# EAGLE board BLE_Mate2-Panel-v10 (EAGLE 6.6.0), part 1 of 2
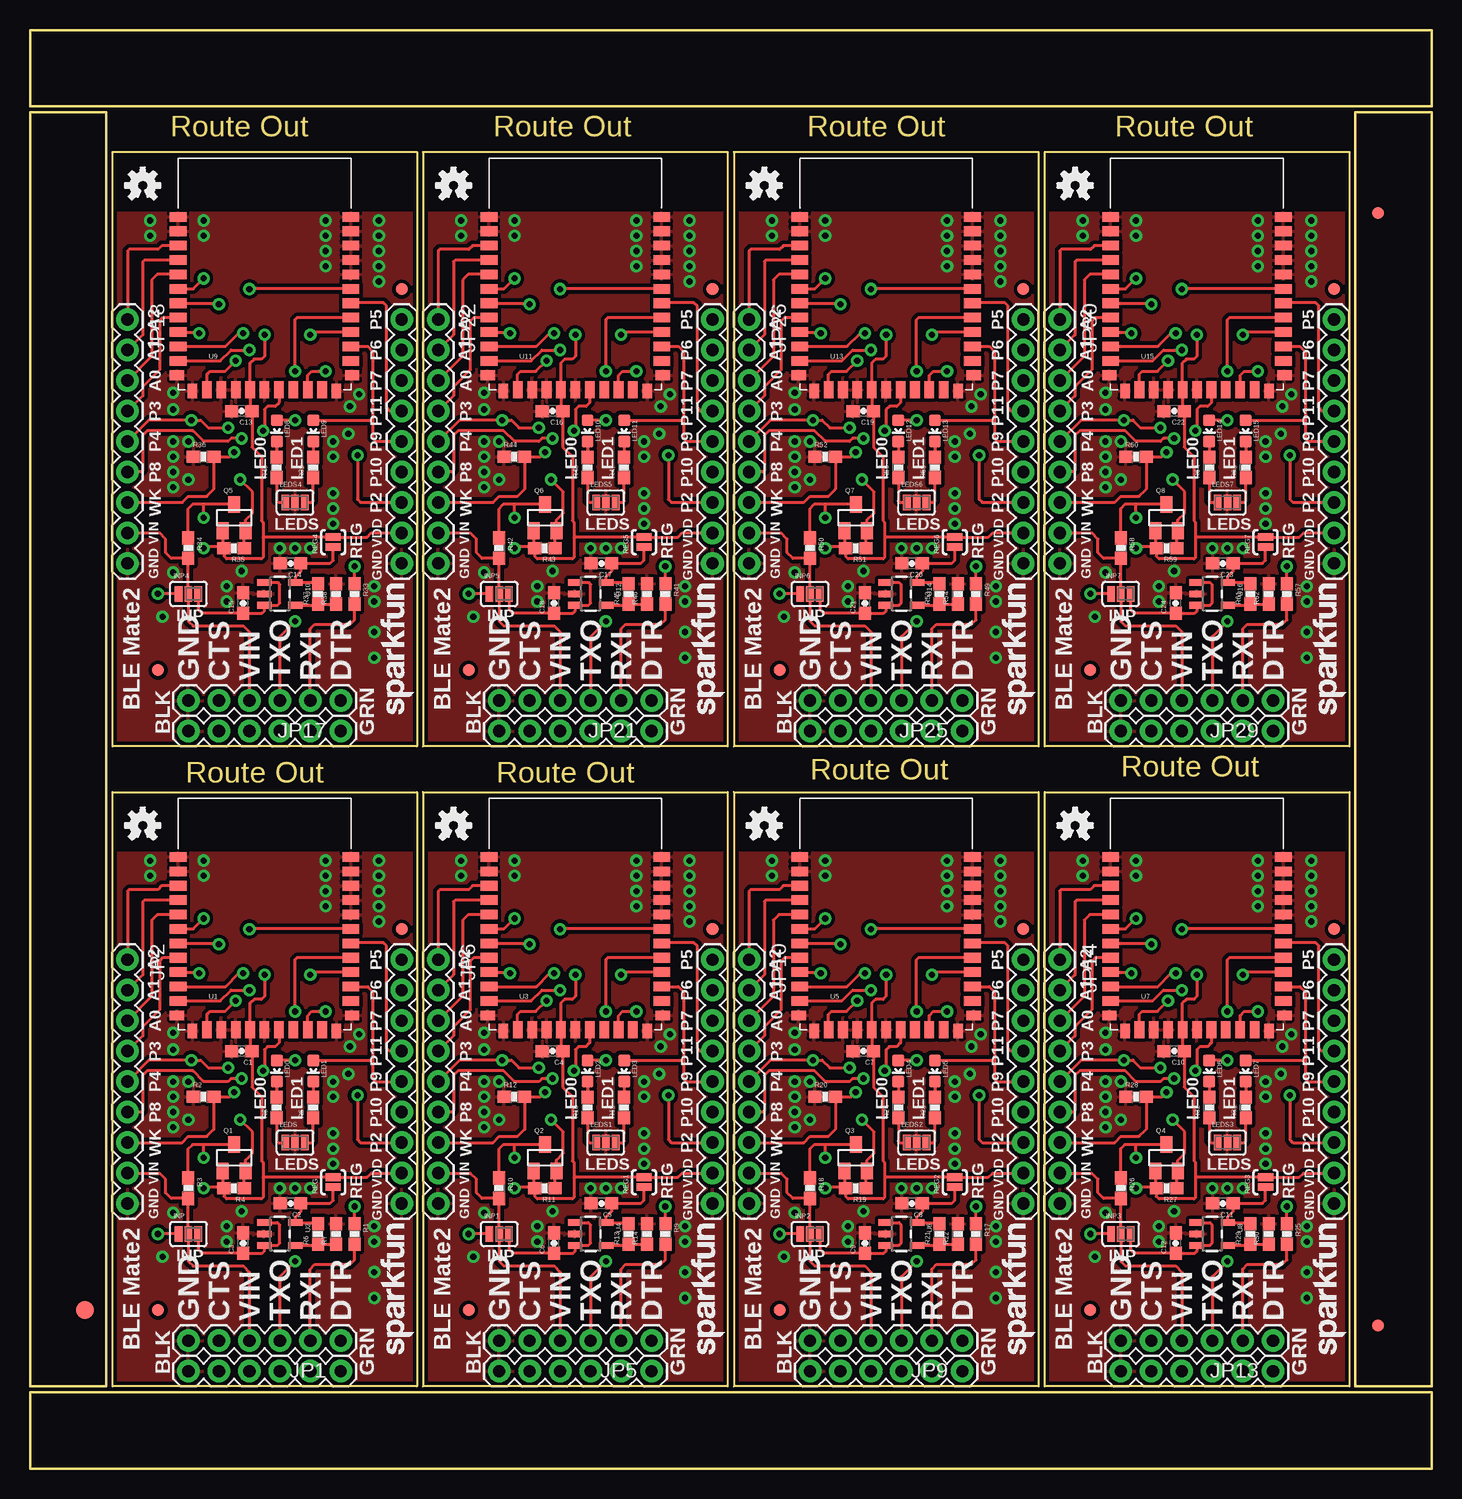
[diagram p0: board, top side]
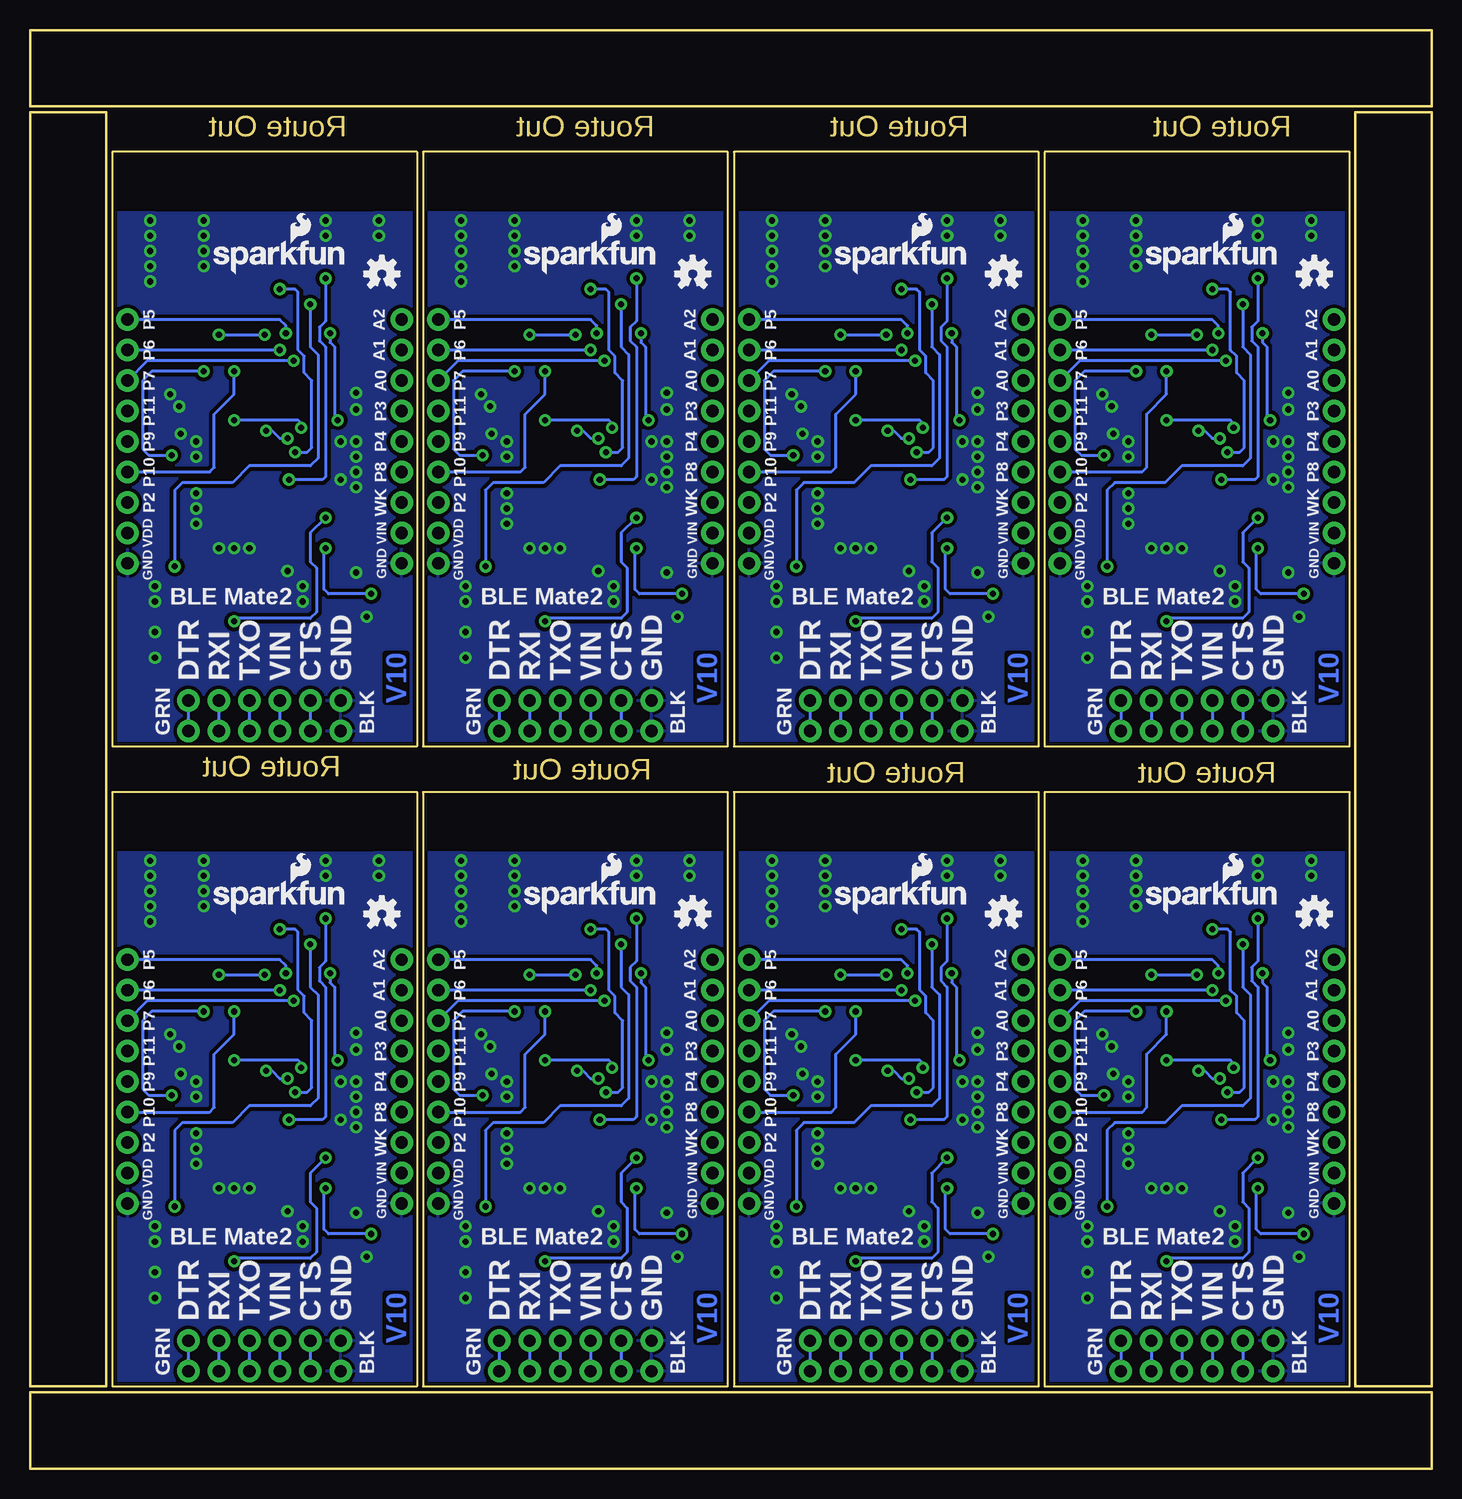
[diagram p1: board, bottom side, seen from below]

Size 116.84 x 119.89 mm. Coordinates in mm from the lower left corner, seen from the top.
Outline: 6.86,56.39 32.26,56.39 32.26,6.86 6.86,6.86 6.86,56.39
Outline: 32.77,56.39 58.17,56.39 58.17,6.86 32.77,6.86 32.77,56.39
Outline: 58.67,56.39 84.07,56.39 84.07,6.86 58.67,6.86 58.67,56.39
Outline: 84.58,56.39 109.98,56.39 109.98,6.86 84.58,6.86 84.58,56.39
Outline: 6.86,109.73 32.26,109.73 32.26,60.2 6.86,60.2 6.86,109.73
Outline: 32.77,109.73 58.17,109.73 58.17,60.2 32.77,60.2 32.77,109.73
Outline: 58.67,109.73 84.07,109.73 84.07,60.2 58.67,60.2 58.67,109.73
Outline: 84.58,109.73 109.98,109.73 109.98,60.2 84.58,60.2 84.58,109.73
Outline: 6.35,6.86 6.35,113.03 0,113.03 0,6.86 6.35,6.86
Outline: 0,0 116.84,0 116.84,6.35 0,6.35 0,0
Outline: 116.84,6.86 116.84,113.03 110.49,113.03 110.49,6.86 116.84,6.86
Outline: 116.84,119.89 0,119.89 0,113.54 116.84,113.54 116.84,119.89
Copper layers (1*16): Top 0.035mm / dielectric 1.5mm / Bottom 0.035mm
Design rules "Sparkfun *": minimum track width 8mil, minimum drill 20mil, track to track 8mil, track to pad 8mil, pad to pad 8mil, via to via 8mil, smd to smd 8mil, copper to edge 8mil, drill to drill 8mil, minimum pad ring 12mil, minimum via ring 10mil, stop-mask expansion 4mil, vias tented up to drill 20mil, thermal gap 10mil

## Footprints (pad centres in the part's own frame; a part is rotated, then mirrored left to right if it is on the bottom)
0603-CAP = smd 1.1 x 1: 1 -0.85,0; 2 0.85,0
FIDUCIAL-1.5X3 = smd 1.5 x 1.5: 1 0,0
FIDUCIAL-1X2 = smd 1 x 1: 1 0,0
PAD-JUMPER-3-2OF3_NC_BY_PASTE_YES_SILK_FULL_BOX = smd 0.635 x 1.27: 1 -0.813,0; 2 0,0; 3 0.813,0
FTDI_BASIC = drill 1.016 pad 1.88: CTS 10.16,0; DTR 0,0; GND 12.7,0; RXI 2.54,0; TXO 5.08,0; VCC 7.62,0
1X09 = drill 1.016 pad 1.88: 1 0,0; 2 2.54,0; 3 5.08,0; 4 7.62,0; 5 10.16,0; 6 12.7,0; 7 15.24,0; 8 17.78,0; 9 20.32,0
1X06 = drill 1.016 pad 1.88: CTS 10.16,0; DTR 0,0; GND 12.7,0; RXI 2.54,0; TXO 5.08,0; VCC 7.62,0
LED-0603 = smd 1 x 1: A 0,-0.877; C 0,0.877
PAD-JUMPER-3-NC_BY_PASTE_YES_SILK_FULL_BOX = smd 0.635 x 1.27: 1 -0.813,0; 2 0,0; 3 0.813,0
SOT23 = smd 1 x 1.4: 1 -0.95,-1.1; 2 0.95,-1.1; 3 0,1.1
0603-RES = smd 1.1 x 1: 1 -0.85,0; 2 0.85,0
PAD-JUMPER-2-NC_BY_PASTE_YES_SILK = smd 0.635 x 1.27: 1 -0.401,0; 2 0.413,0
BC118 = smd 1.4 x 0.8: 1 -7.2,4.75; 2 -7.2,3.55; 3 -7.2,2.35; 4 -7.2,1.15; 5 -7.2,-0.05; 6 -7.2,-1.25; 7 -7.2,-2.45; 8 -7.2,-3.65; 9 -7.2,-4.85; 10 -7.2,-6.05; 11 -7.2,-7.25; 25 7.2,-7.25; 26 7.2,-6.05; 27 7.2,-4.85; 28 7.2,-3.65; 29 7.2,-2.45; 30 7.2,-1.25; 31 7.2,-0.05; 32 7.2,1.15; 33 7.2,2.35; 34 7.2,3.55; 35 7.2,4.75 | smd 1.2 x 0.8: 12 -7.3,-8.45; 24 7.3,-8.45 | smd 0.8 x 1.2: 13 -6,-9.75; 23 6,-9.75 | smd 0.8 x 1.4: 14 -4.8,-9.65; 15 -3.6,-9.65; 16 -2.4,-9.65; 17 -1.2,-9.65; 18 0,-9.65; 19 1.2,-9.65; 20 2.4,-9.65; 21 3.6,-9.65; 22 4.8,-9.65
SOT23-5 = smd 0.55 x 1.2: 1 -0.95,-1.3; 2 0,-1.3; 3 0.95,-1.3; 4 0.95,1.3; 5 -0.95,1.3

## Placement (x,y rotation side)
C1  10nF  [0603-CAP]  17.65,34.8 180 top
C2  2.2uF  [0603-CAP]  21.72,22.1 180 top
C3  1.0uF  [0603-CAP]  17.78,18.8 90 top
C4  10nF  [0603-CAP]  43.56,34.8 180 top
C5  2.2uF  [0603-CAP]  47.62,22.1 180 top
C6  1.0uF  [0603-CAP]  43.69,18.8 90 top
C7  10nF  [0603-CAP]  69.47,34.8 180 top
C8  2.2uF  [0603-CAP]  73.53,22.1 180 top
C9  1.0uF  [0603-CAP]  69.6,18.8 90 top
C10  10nF  [0603-CAP]  95.38,34.8 180 top
C11  2.2uF  [0603-CAP]  99.44,22.1 180 top
C12  1.0uF  [0603-CAP]  95.5,18.8 90 top
C13  10nF  [0603-CAP]  17.65,88.14 180 top
C14  2.2uF  [0603-CAP]  21.72,75.44 180 top
C15  1.0uF  [0603-CAP]  17.78,72.14 90 top
C16  10nF  [0603-CAP]  43.56,88.14 180 top
C17  2.2uF  [0603-CAP]  47.62,75.44 180 top
C18  1.0uF  [0603-CAP]  43.69,72.14 90 top
C19  10nF  [0603-CAP]  69.47,88.14 180 top
C20  2.2uF  [0603-CAP]  73.53,75.44 180 top
C21  1.0uF  [0603-CAP]  69.6,72.14 90 top
C22  10nF  [0603-CAP]  95.38,88.14 180 top
C23  2.2uF  [0603-CAP]  99.44,75.44 180 top
C24  1.0uF  [0603-CAP]  95.5,72.14 90 top
E$1  [FIDUCIAL-1.5X3]  4.57,13.21 0 top
E$4  [FIDUCIAL-1X2]  112.39,11.94 0 top
E$5  [FIDUCIAL-1X2]  112.39,104.65 180 top
FID1  FIDUCIAL1X2  [FIDUCIAL-1X2]  10.67,13.21 0 top
FID2  FIDUCIAL1X2  [FIDUCIAL-1X2]  30.99,44.96 0 top
FID3  FIDUCIAL1X2  [FIDUCIAL-1X2]  36.58,13.21 0 top
FID4  FIDUCIAL1X2  [FIDUCIAL-1X2]  56.9,44.96 0 top
FID5  FIDUCIAL1X2  [FIDUCIAL-1X2]  62.48,13.21 0 top
FID6  FIDUCIAL1X2  [FIDUCIAL-1X2]  82.8,44.96 0 top
FID7  FIDUCIAL1X2  [FIDUCIAL-1X2]  88.39,13.21 0 top
FID8  FIDUCIAL1X2  [FIDUCIAL-1X2]  108.71,44.96 0 top
FID9  FIDUCIAL1X2  [FIDUCIAL-1X2]  10.67,66.55 0 top
FID10  FIDUCIAL1X2  [FIDUCIAL-1X2]  30.99,98.3 0 top
FID11  FIDUCIAL1X2  [FIDUCIAL-1X2]  36.58,66.55 0 top
FID12  FIDUCIAL1X2  [FIDUCIAL-1X2]  56.9,98.3 0 top
FID13  FIDUCIAL1X2  [FIDUCIAL-1X2]  62.48,66.55 0 top
FID14  FIDUCIAL1X2  [FIDUCIAL-1X2]  82.8,98.3 0 top
FID15  FIDUCIAL1X2  [FIDUCIAL-1X2]  88.39,66.55 0 top
FID16  FIDUCIAL1X2  [FIDUCIAL-1X2]  108.71,98.3 0 top
INP  JUMPER-PAD-3-2OF3_NC_BY_PASTE  [PAD-JUMPER-3-2OF3_NC_BY_PASTE_YES_SILK_FULL_BOX]  13.21,19.56 0 top
INP1  JUMPER-PAD-3-2OF3_NC_BY_PASTE  [PAD-JUMPER-3-2OF3_NC_BY_PASTE_YES_SILK_FULL_BOX]  39.12,19.56 0 top
INP2  JUMPER-PAD-3-2OF3_NC_BY_PASTE  [PAD-JUMPER-3-2OF3_NC_BY_PASTE_YES_SILK_FULL_BOX]  65.02,19.56 0 top
INP3  JUMPER-PAD-3-2OF3_NC_BY_PASTE  [PAD-JUMPER-3-2OF3_NC_BY_PASTE_YES_SILK_FULL_BOX]  90.93,19.56 0 top
INP4  JUMPER-PAD-3-2OF3_NC_BY_PASTE  [PAD-JUMPER-3-2OF3_NC_BY_PASTE_YES_SILK_FULL_BOX]  13.21,72.9 0 top
INP5  JUMPER-PAD-3-2OF3_NC_BY_PASTE  [PAD-JUMPER-3-2OF3_NC_BY_PASTE_YES_SILK_FULL_BOX]  39.12,72.9 0 top
INP6  JUMPER-PAD-3-2OF3_NC_BY_PASTE  [PAD-JUMPER-3-2OF3_NC_BY_PASTE_YES_SILK_FULL_BOX]  65.02,72.9 0 top
INP7  JUMPER-PAD-3-2OF3_NC_BY_PASTE  [PAD-JUMPER-3-2OF3_NC_BY_PASTE_YES_SILK_FULL_BOX]  90.93,72.9 0 top
JP1  FTDI_BASICPTH  [FTDI_BASIC]  25.91,10.67 180 top
JP2  M09  [1X09]  8.13,42.42 270 top
JP3  M09  [1X09]  30.99,42.42 270 top
JP4  [1X06]  25.91,8.13 180 top
JP5  FTDI_BASICPTH  [FTDI_BASIC]  51.82,10.67 180 top
JP6  M09  [1X09]  34.04,42.42 270 top
JP7  M09  [1X09]  56.9,42.42 270 top
JP8  [1X06]  51.82,8.13 180 top
JP9  FTDI_BASICPTH  [FTDI_BASIC]  77.72,10.67 180 top
JP10  M09  [1X09]  59.94,42.42 270 top
JP11  M09  [1X09]  82.8,42.42 270 top
JP12  [1X06]  77.72,8.13 180 top
JP13  FTDI_BASICPTH  [FTDI_BASIC]  103.63,10.67 180 top
JP14  M09  [1X09]  85.85,42.42 270 top
JP15  M09  [1X09]  108.71,42.42 270 top
JP16  [1X06]  103.63,8.13 180 top
JP17  FTDI_BASICPTH  [FTDI_BASIC]  25.91,64.01 180 top
JP18  M09  [1X09]  8.13,95.76 270 top
JP19  M09  [1X09]  30.99,95.76 270 top
JP20  [1X06]  25.91,61.47 180 top
JP21  FTDI_BASICPTH  [FTDI_BASIC]  51.82,64.01 180 top
JP22  M09  [1X09]  34.04,95.76 270 top
JP23  M09  [1X09]  56.9,95.76 270 top
JP24  [1X06]  51.82,61.47 180 top
JP25  FTDI_BASICPTH  [FTDI_BASIC]  77.72,64.01 180 top
JP26  M09  [1X09]  59.94,95.76 270 top
JP27  M09  [1X09]  82.8,95.76 270 top
JP28  [1X06]  77.72,61.47 180 top
JP29  FTDI_BASICPTH  [FTDI_BASIC]  103.63,64.01 180 top
JP30  M09  [1X09]  85.85,95.76 270 top
JP31  M09  [1X09]  108.71,95.76 270 top
JP32  [1X06]  103.63,61.47 180 top
LED0  BLUE  [LED-0603]  20.57,33.15 180 top
LED1  RED  [LED-0603]  23.62,33.15 180 top
LED2  BLUE  [LED-0603]  46.48,33.15 180 top
LED3  RED  [LED-0603]  49.53,33.15 180 top
LED4  BLUE  [LED-0603]  72.39,33.15 180 top
LED5  RED  [LED-0603]  75.44,33.15 180 top
LED6  BLUE  [LED-0603]  98.3,33.15 180 top
LED7  RED  [LED-0603]  101.35,33.15 180 top
LED8  BLUE  [LED-0603]  20.57,86.49 180 top
LED9  RED  [LED-0603]  23.62,86.49 180 top
LED10  BLUE  [LED-0603]  46.48,86.49 180 top
LED11  RED  [LED-0603]  49.53,86.49 180 top
LED12  BLUE  [LED-0603]  72.39,86.49 180 top
LED13  RED  [LED-0603]  75.44,86.49 180 top
LED14  BLUE  [LED-0603]  98.3,86.49 180 top
LED15  RED  [LED-0603]  101.35,86.49 180 top
LEDS  JUMPER-PAD-3-NC_BY_PASTE  [PAD-JUMPER-3-NC_BY_PASTE_YES_SILK_FULL_BOX]  22.1,27.18 0 top
LEDS1  JUMPER-PAD-3-NC_BY_PASTE  [PAD-JUMPER-3-NC_BY_PASTE_YES_SILK_FULL_BOX]  48.01,27.18 0 top
LEDS2  JUMPER-PAD-3-NC_BY_PASTE  [PAD-JUMPER-3-NC_BY_PASTE_YES_SILK_FULL_BOX]  73.91,27.18 0 top
LEDS3  JUMPER-PAD-3-NC_BY_PASTE  [PAD-JUMPER-3-NC_BY_PASTE_YES_SILK_FULL_BOX]  99.82,27.18 0 top
LEDS4  JUMPER-PAD-3-NC_BY_PASTE  [PAD-JUMPER-3-NC_BY_PASTE_YES_SILK_FULL_BOX]  22.1,80.52 0 top
LEDS5  JUMPER-PAD-3-NC_BY_PASTE  [PAD-JUMPER-3-NC_BY_PASTE_YES_SILK_FULL_BOX]  48.01,80.52 0 top
LEDS6  JUMPER-PAD-3-NC_BY_PASTE  [PAD-JUMPER-3-NC_BY_PASTE_YES_SILK_FULL_BOX]  73.91,80.52 0 top
LEDS7  JUMPER-PAD-3-NC_BY_PASTE  [PAD-JUMPER-3-NC_BY_PASTE_YES_SILK_FULL_BOX]  99.82,80.52 0 top
LOGO1  SFE_LOGO_NAME.1_INCH  [SFE_LOGO_NAME_.1]  32.51,9.02 90 top
LOGO2  OSHW-LOGOS  [OSHW-LOGO-S]  9.4,53.59 0 top
LOGO3  SFE_LOGO_NAME_FLAME.1_INCH  [SFE_LOGO_NAME_FLAME_.1]  24.26,46.1 0 bottom
LOGO4  OSHW-LOGOS  [OSHW-LOGO-S]  9.78,46.23 0 bottom
LOGO5  SFE_LOGO_NAME.1_INCH  [SFE_LOGO_NAME_.1]  58.42,9.02 90 top
LOGO6  OSHW-LOGOS  [OSHW-LOGO-S]  35.31,53.59 0 top
LOGO7  SFE_LOGO_NAME_FLAME.1_INCH  [SFE_LOGO_NAME_FLAME_.1]  50.16,46.1 0 bottom
LOGO8  OSHW-LOGOS  [OSHW-LOGO-S]  35.69,46.23 0 bottom
LOGO9  SFE_LOGO_NAME.1_INCH  [SFE_LOGO_NAME_.1]  84.33,9.02 90 top
LOGO10  OSHW-LOGOS  [OSHW-LOGO-S]  61.21,53.59 0 top
LOGO11  SFE_LOGO_NAME_FLAME.1_INCH  [SFE_LOGO_NAME_FLAME_.1]  76.07,46.1 0 bottom
LOGO12  OSHW-LOGOS  [OSHW-LOGO-S]  61.59,46.23 0 bottom
LOGO13  SFE_LOGO_NAME.1_INCH  [SFE_LOGO_NAME_.1]  110.24,9.02 90 top
LOGO14  OSHW-LOGOS  [OSHW-LOGO-S]  87.12,53.59 0 top
LOGO15  SFE_LOGO_NAME_FLAME.1_INCH  [SFE_LOGO_NAME_FLAME_.1]  101.98,46.1 0 bottom
LOGO16  OSHW-LOGOS  [OSHW-LOGO-S]  87.5,46.23 0 bottom
LOGO17  SFE_LOGO_NAME.1_INCH  [SFE_LOGO_NAME_.1]  32.51,62.36 90 top
LOGO18  OSHW-LOGOS  [OSHW-LOGO-S]  9.4,106.93 0 top
LOGO19  SFE_LOGO_NAME_FLAME.1_INCH  [SFE_LOGO_NAME_FLAME_.1]  24.26,99.44 0 bottom
LOGO20  OSHW-LOGOS  [OSHW-LOGO-S]  9.78,99.57 0 bottom
LOGO21  SFE_LOGO_NAME.1_INCH  [SFE_LOGO_NAME_.1]  58.42,62.36 90 top
LOGO22  OSHW-LOGOS  [OSHW-LOGO-S]  35.31,106.93 0 top
LOGO23  SFE_LOGO_NAME_FLAME.1_INCH  [SFE_LOGO_NAME_FLAME_.1]  50.16,99.44 0 bottom
LOGO24  OSHW-LOGOS  [OSHW-LOGO-S]  35.69,99.57 0 bottom
LOGO25  SFE_LOGO_NAME.1_INCH  [SFE_LOGO_NAME_.1]  84.33,62.36 90 top
LOGO26  OSHW-LOGOS  [OSHW-LOGO-S]  61.21,106.93 0 top
LOGO27  SFE_LOGO_NAME_FLAME.1_INCH  [SFE_LOGO_NAME_FLAME_.1]  76.07,99.44 0 bottom
LOGO28  OSHW-LOGOS  [OSHW-LOGO-S]  61.59,99.57 0 bottom
LOGO29  SFE_LOGO_NAME.1_INCH  [SFE_LOGO_NAME_.1]  110.24,62.36 90 top
LOGO30  OSHW-LOGOS  [OSHW-LOGO-S]  87.12,106.93 0 top
LOGO31  SFE_LOGO_NAME_FLAME.1_INCH  [SFE_LOGO_NAME_FLAME_.1]  101.98,99.44 0 bottom
LOGO32  OSHW-LOGOS  [OSHW-LOGO-S]  87.5,99.57 0 bottom
Q1  BSS138  [SOT23]  17.02,25.91 0 top
Q2  BSS138  [SOT23]  42.93,25.91 0 top
Q3  BSS138  [SOT23]  68.83,25.91 0 top
Q4  BSS138  [SOT23]  94.74,25.91 0 top
Q5  BSS138  [SOT23]  17.02,79.25 0 top
Q6  BSS138  [SOT23]  42.93,79.25 0 top
Q7  BSS138  [SOT23]  68.83,79.25 0 top
Q8  BSS138  [SOT23]  94.74,79.25 0 top
R1  1K  [0603-RES]  27.05,19.56 270 top
R2  100k  [0603-RES]  14.48,30.99 0 top
R3  10K  [0603-RES]  13.21,23.37 270 top
R4  10K  [0603-RES]  17.02,23.37 180 top
R5  1K  [0603-RES]  23.62,30.1 90 top
R6  16.2k  [0603-RES]  24,19.56 90 top
R7  26.7k  [0603-RES]  25.53,19.56 90 top
R8  1K  [0603-RES]  20.57,30.1 90 top
R9  1K  [0603-RES]  52.96,19.56 270 top
R10  10K  [0603-RES]  39.12,23.37 270 top
R11  10K  [0603-RES]  42.93,23.37 180 top
R12  100k  [0603-RES]  40.39,30.99 0 top
R13  16.2k  [0603-RES]  49.91,19.56 90 top
R14  26.7k  [0603-RES]  51.44,19.56 90 top
R15  1K  [0603-RES]  49.53,30.1 90 top
R16  1K  [0603-RES]  46.48,30.1 90 top
R17  1K  [0603-RES]  78.87,19.56 270 top
R18  10K  [0603-RES]  65.02,23.37 270 top
R19  10K  [0603-RES]  68.83,23.37 180 top
R20  100k  [0603-RES]  66.29,30.99 0 top
R21  16.2k  [0603-RES]  75.82,19.56 90 top
R22  26.7k  [0603-RES]  77.34,19.56 90 top
R23  1K  [0603-RES]  75.44,30.1 90 top
R24  1K  [0603-RES]  72.39,30.1 90 top
R25  1K  [0603-RES]  104.78,19.56 270 top
R26  10K  [0603-RES]  90.93,23.37 270 top
R27  10K  [0603-RES]  94.74,23.37 180 top
R28  100k  [0603-RES]  92.2,30.99 0 top
R29  16.2k  [0603-RES]  101.73,19.56 90 top
R30  26.7k  [0603-RES]  103.25,19.56 90 top
R31  1K  [0603-RES]  101.35,30.1 90 top
R32  1K  [0603-RES]  98.3,30.1 90 top
R33  1K  [0603-RES]  27.05,72.9 270 top
R34  10K  [0603-RES]  13.21,76.71 270 top
R35  10K  [0603-RES]  17.02,76.71 180 top
R36  100k  [0603-RES]  14.48,84.33 0 top
R37  16.2k  [0603-RES]  24,72.9 90 top
R38  26.7k  [0603-RES]  25.53,72.9 90 top
R39  1K  [0603-RES]  23.62,83.44 90 top
R40  1K  [0603-RES]  20.57,83.44 90 top
R41  1K  [0603-RES]  52.96,72.9 270 top
R42  10K  [0603-RES]  39.12,76.71 270 top
R43  10K  [0603-RES]  42.93,76.71 180 top
R44  100k  [0603-RES]  40.39,84.33 0 top
R45  16.2k  [0603-RES]  49.91,72.9 90 top
R46  26.7k  [0603-RES]  51.44,72.9 90 top
R47  1K  [0603-RES]  49.53,83.44 90 top
R48  1K  [0603-RES]  46.48,83.44 90 top
R49  1K  [0603-RES]  78.87,72.9 270 top
R50  10K  [0603-RES]  65.02,76.71 270 top
R51  10K  [0603-RES]  68.83,76.71 180 top
R52  100k  [0603-RES]  66.29,84.33 0 top
R53  16.2k  [0603-RES]  75.82,72.9 90 top
R54  26.7k  [0603-RES]  77.34,72.9 90 top
R55  1K  [0603-RES]  75.44,83.44 90 top
R56  1K  [0603-RES]  72.39,83.44 90 top
R57  1K  [0603-RES]  104.78,72.9 270 top
R58  10K  [0603-RES]  90.93,76.71 270 top
R59  10K  [0603-RES]  94.74,76.71 180 top
R60  100k  [0603-RES]  92.2,84.33 0 top
R61  16.2k  [0603-RES]  101.73,72.9 90 top
R62  26.7k  [0603-RES]  103.25,72.9 90 top
R63  1K  [0603-RES]  101.35,83.44 90 top
R64  1K  [0603-RES]  98.3,83.44 90 top
REG  JUMPER-PAD-2-NC_BY_PASTE  [PAD-JUMPER-2-NC_BY_PASTE_YES_SILK]  25.27,23.88 90 top
REG1  JUMPER-PAD-2-NC_BY_PASTE  [PAD-JUMPER-2-NC_BY_PASTE_YES_SILK]  51.18,23.88 90 top
REG2  JUMPER-PAD-2-NC_BY_PASTE  [PAD-JUMPER-2-NC_BY_PASTE_YES_SILK]  77.09,23.88 90 top
REG3  JUMPER-PAD-2-NC_BY_PASTE  [PAD-JUMPER-2-NC_BY_PASTE_YES_SILK]  103,23.88 90 top
REG4  JUMPER-PAD-2-NC_BY_PASTE  [PAD-JUMPER-2-NC_BY_PASTE_YES_SILK]  25.27,77.22 90 top
REG5  JUMPER-PAD-2-NC_BY_PASTE  [PAD-JUMPER-2-NC_BY_PASTE_YES_SILK]  51.18,77.22 90 top
REG6  JUMPER-PAD-2-NC_BY_PASTE  [PAD-JUMPER-2-NC_BY_PASTE_YES_SILK]  77.09,77.22 90 top
REG7  JUMPER-PAD-2-NC_BY_PASTE  [PAD-JUMPER-2-NC_BY_PASTE_YES_SILK]  103,77.22 90 top
U1  [BC118]  19.56,46.23 0 top
U2  AP2202-ADJ  [SOT23-5]  20.83,19.56 270 top
U3  [BC118]  45.47,46.23 0 top
U4  AP2202-ADJ  [SOT23-5]  46.74,19.56 270 top
U5  [BC118]  71.37,46.23 0 top
U6  AP2202-ADJ  [SOT23-5]  72.64,19.56 270 top
U7  [BC118]  97.28,46.23 0 top
U8  AP2202-ADJ  [SOT23-5]  98.55,19.56 270 top
U9  [BC118]  19.56,99.57 0 top
U10  AP2202-ADJ  [SOT23-5]  20.83,72.9 270 top
U11  [BC118]  45.47,99.57 0 top
U12  AP2202-ADJ  [SOT23-5]  46.74,72.9 270 top
U13  [BC118]  71.37,99.57 0 top
U14  AP2202-ADJ  [SOT23-5]  72.64,72.9 270 top
U15  [BC118]  97.28,99.57 0 top
U16  AP2202-ADJ  [SOT23-5]  98.55,72.9 270 top

## Library data of the parts
C1 C4 C7 C10 C13 C16 C19 C22 = SparkFun-Capacitors; PROD_ID: CAP-00867
C2 C5 C8 C11 C14 C17 C20 C23 = SparkFun-Capacitors; PROD_ID: CAP-07888
C3 C6 C9 C12 C15 C18 C21 C24 = SparkFun-Capacitors; PROD_ID: CAP-00868
E$1 = SparkFun-Retired
E$4 E$5 FID1-FID16 LOGO1-LOGO32 = SparkFun-Aesthetics
INP INP1-INP7 LEDS LEDS1-LEDS7 REG REG1-REG7 = SparkFun-Passives
JP1-JP32 = SparkFun-Connectors
LED0 LED2 LED4 LED6 LED8 LED10 LED12 LED14 = SparkFun-LED; PROD_ID: DIO-08575
LED1 LED3 LED5 LED7 LED9 LED11 LED13 LED15 = SparkFun-LED; PROD_ID: DIO-00819
Q1-Q8 = SparkFun-DiscreteSemi; PROD_ID: TRANS-00830
R1 R5 R8 R9 R15-R17 R23-R25 R31-R33 R39-R41 R47-R49 R55-R57 R63 R64 = SparkFun-Resistors; PROD_ID: RES-07856
R2 R12 R20 R28 R36 R44 R52 R60 = SparkFun-Resistors; PROD_ID: RES-07828
R3 R4 R10 R11 R18 R19 R26 R27 R34 R35 R42 R43 R50 R51 R58 R59 = SparkFun-Resistors; PROD_ID: RES-00824
R6 R7 R13 R14 R21 R22 R29 R30 R37 R38 R45 R46 R53 R54 R61 R62 = SparkFun-Resistors; PROD_ID: RES-12187
U1 U3 U5 U7 U9 U11 U13 U15 = SparkFun-RF; PROD_ID: WRL-12203
U2 U4 U6 U8 U10 U12 U14 U16 = SparkFun-PowerIC; PROD_ID: VREG-12189

## Nets
3.3V: C2.1 R6.2 REG.1 U2.5
3.3V1: C5.1 R13.2 REG1.1 U4.5
3.3V2: C8.1 R21.2 REG2.1 U6.5
3.3V3: C11.1 R29.2 REG3.1 U8.5
3.3V4: C14.1 R37.2 REG4.1 U10.5
3.3V5: C17.1 R45.2 REG5.1 U12.5
3.3V6: C20.1 R53.2 REG6.1 U14.5
3.3V7: C23.1 R61.2 REG7.1 U16.5
AIO_0: JP2.3 U1.5
AIO_1: JP2.2 U1.4
AIO_2: JP2.1 U1.3
AIO_3: JP6.1 U3.3
AIO_4: JP6.2 U3.4
AIO_5: JP6.3 U3.5
AIO_6: JP10.1 U5.3
AIO_7: JP10.2 U5.4
AIO_8: JP10.3 U5.5
AIO_9: JP14.1 U7.3
AIO_10: JP14.2 U7.4
AIO_11: JP14.3 U7.5
AIO_12: JP18.1 U9.3
AIO_13: JP18.2 U9.4
AIO_14: JP18.3 U9.5
AIO_15: JP22.1 U11.3
AIO_16: JP22.2 U11.4
AIO_17: JP22.3 U11.5
AIO_18: JP26.1 U13.3
AIO_19: JP26.2 U13.4
AIO_20: JP26.3 U13.5
AIO_21: JP30.1 U15.3
AIO_22: JP30.2 U15.4
AIO_23: JP30.3 U15.5
CTS: JP1.CTS JP4.CTS
CTS1: JP5.CTS JP8.CTS
CTS2: JP9.CTS JP12.CTS
CTS3: JP13.CTS JP16.CTS
CTS4: JP17.CTS JP20.CTS
CTS5: JP21.CTS JP24.CTS
CTS6: JP25.CTS JP28.CTS
CTS7: JP29.CTS JP32.CTS
DTR: JP1.DTR JP4.DTR
DTR1: JP5.DTR JP8.DTR
DTR2: JP9.DTR JP12.DTR
DTR3: JP13.DTR JP16.DTR
DTR4: JP17.DTR JP20.DTR
DTR5: JP21.DTR JP24.DTR
DTR6: JP25.DTR JP28.DTR
DTR7: JP29.DTR JP32.DTR
GND: C1.2 C2.2 C3.2 JP1.GND JP2.9 JP3.9 JP4.GND LEDS.2 R2.1 R7.2 U1.1 U1.2 U1.12 U1.13 U1.15 U1.16 U1.18 U1.23 U1.24 U1.31 U1.32 U1.33 U1.34 U1.35 U2.2
GND1: C4.2 C5.2 C6.2 JP5.GND JP6.9 JP7.9 JP8.GND LEDS1.2 R12.1 R14.2 U3.1 U3.2 U3.12 U3.13 U3.15 U3.16 U3.18 U3.23 U3.24 U3.31 U3.32 U3.33 U3.34 U3.35 U4.2
GND2: C7.2 C8.2 C9.2 JP9.GND JP10.9 JP11.9 JP12.GND LEDS2.2 R20.1 R22.2 U5.1 U5.2 U5.12 U5.13 U5.15 U5.16 U5.18 U5.23 U5.24 U5.31 U5.32 U5.33 U5.34 U5.35 U6.2
GND3: C10.2 C11.2 C12.2 JP13.GND JP14.9 JP15.9 JP16.GND LEDS3.2 R28.1 R30.2 U7.1 U7.2 U7.12 U7.13 U7.15 U7.16 U7.18 U7.23 U7.24 U7.31 U7.32 U7.33 U7.34 U7.35 U8.2
GND4: C13.2 C14.2 C15.2 JP17.GND JP18.9 JP19.9 JP20.GND LEDS4.2 R36.1 R38.2 U9.1 U9.2 U9.12 U9.13 U9.15 U9.16 U9.18 U9.23 U9.24 U9.31 U9.32 U9.33 U9.34 U9.35 U10.2
GND5: C16.2 C17.2 C18.2 JP21.GND JP22.9 JP23.9 JP24.GND LEDS5.2 R44.1 R46.2 U11.1 U11.2 U11.12 U11.13 U11.15 U11.16 U11.18 U11.23 U11.24 U11.31 U11.32 U11.33 U11.34 U11.35 U12.2
GND6: C19.2 C20.2 C21.2 JP25.GND JP26.9 JP27.9 JP28.GND LEDS6.2 R52.1 R54.2 U13.1 U13.2 U13.12 U13.13 U13.15 U13.16 U13.18 U13.23 U13.24 U13.31 U13.32 U13.33 U13.34 U13.35 U14.2
GND7: C22.2 C23.2 C24.2 JP29.GND JP30.9 JP31.9 JP32.GND LEDS7.2 R60.1 R62.2 U15.1 U15.2 U15.12 U15.13 U15.15 U15.16 U15.18 U15.23 U15.24 U15.31 U15.32 U15.33 U15.34 U15.35 U16.2
N$1: R13.1 R14.1 U4.4
N$2: R1.1 U1.7
N$3: R6.1 R7.1 U2.4
N$4: Q1.2 R4.1 U1.6
N$5: LEDS.1 R8.1
N$6: LEDS.3 R5.1
N$7: Q2.2 R11.1 U3.6
N$8: LED0.C R8.2
N$9: LED1.C R5.2
N$10: R9.1 U3.7
N$11: LEDS1.1 R16.1
N$12: LEDS1.3 R15.1
N$13: LED2.C R16.2
N$14: LED3.C R15.2
N$15: R21.1 R22.1 U6.4
N$16: Q3.2 R19.1 U5.6
N$17: R17.1 U5.7
N$18: LEDS2.1 R24.1
N$19: LEDS2.3 R23.1
N$20: LED4.C R24.2
N$21: LED5.C R23.2
N$22: R29.1 R30.1 U8.4
N$23: Q4.2 R27.1 U7.6
N$24: R25.1 U7.7
N$25: LEDS3.1 R32.1
N$26: LEDS3.3 R31.1
N$27: LED6.C R32.2
N$28: LED7.C R31.2
N$29: R37.1 R38.1 U10.4
N$30: Q5.2 R35.1 U9.6
N$31: R33.1 U9.7
N$32: LEDS4.1 R40.1
N$33: LEDS4.3 R39.1
N$34: LED8.C R40.2
N$35: LED9.C R39.2
N$36: R45.1 R46.1 U12.4
N$37: Q6.2 R43.1 U11.6
N$38: R41.1 U11.7
N$39: LEDS5.1 R48.1
N$40: LEDS5.3 R47.1
N$41: LED10.C R48.2
N$42: LED11.C R47.2
N$43: R53.1 R54.1 U14.4
N$44: Q7.2 R51.1 U13.6
N$45: R49.1 U13.7
N$46: LEDS6.1 R56.1
N$47: LEDS6.3 R55.1
N$48: LED12.C R56.2
N$49: LED13.C R55.2
N$50: R61.1 R62.1 U16.4
N$51: Q8.2 R59.1 U15.6
N$52: R57.1 U15.7
N$53: LEDS7.1 R64.1
N$54: LEDS7.3 R63.1
N$55: LED14.C R64.2
N$56: LED15.C R63.2
PIO_1: JP7.6 U3.28
PIO_2: JP3.7 U1.21
PIO_3: JP2.4 U1.8
PIO_4: JP2.5 LED0.A U1.9
PIO_5: JP3.1 U1.10
PIO_6: JP3.2 U1.11
PIO_7: JP3.3 U1.14
PIO_8: JP2.6 U1.19
PIO_9: JP3.5 LED1.A U1.26
PIO_10: JP3.6 U1.28
PIO_11: JP3.4 U1.29
PIO_12: JP7.5 LED3.A U3.26
PIO_13: JP7.3 U3.14
PIO_14: JP7.2 U3.11
PIO_15: JP7.1 U3.10
PIO_16: JP6.5 LED2.A U3.9
PIO_17: JP6.4 U3.8
PIO_18: JP7.7 U3.21
PIO_19: JP7.4 U3.29
PIO_20: JP6.6 U3.19
PIO_21: JP11.6 U5.28
PIO_22: JP11.5 LED5.A U5.26
PIO_23: JP11.3 U5.14
PIO_24: JP11.2 U5.11
PIO_25: JP11.1 U5.10
PIO_26: JP10.5 LED4.A U5.9
PIO_27: JP10.4 U5.8
PIO_28: JP11.7 U5.21
PIO_29: JP11.4 U5.29
PIO_30: JP10.6 U5.19
PIO_31: JP15.6 U7.28
PIO_32: JP15.5 LED7.A U7.26
PIO_33: JP15.3 U7.14
PIO_34: JP15.2 U7.11
PIO_35: JP15.1 U7.10
PIO_36: JP14.5 LED6.A U7.9
PIO_37: JP14.4 U7.8
PIO_38: JP15.7 U7.21
PIO_39: JP15.4 U7.29
PIO_40: JP14.6 U7.19
PIO_41: JP19.6 U9.28
PIO_42: JP19.5 LED9.A U9.26
PIO_43: JP19.3 U9.14
PIO_44: JP19.2 U9.11
PIO_45: JP19.1 U9.10
PIO_46: JP18.5 LED8.A U9.9
PIO_47: JP18.4 U9.8
PIO_48: JP19.7 U9.21
PIO_49: JP19.4 U9.29
PIO_50: JP18.6 U9.19
PIO_51: JP23.6 U11.28
PIO_52: JP23.5 LED11.A U11.26
PIO_53: JP23.3 U11.14
PIO_54: JP23.2 U11.11
PIO_55: JP23.1 U11.10
PIO_56: JP22.5 LED10.A U11.9
PIO_57: JP22.4 U11.8
PIO_58: JP23.7 U11.21
PIO_59: JP23.4 U11.29
PIO_60: JP22.6 U11.19
PIO_61: JP27.6 U13.28
PIO_62: JP27.5 LED13.A U13.26
PIO_63: JP27.3 U13.14
PIO_64: JP27.2 U13.11
PIO_65: JP27.1 U13.10
PIO_66: JP26.5 LED12.A U13.9
PIO_67: JP26.4 U13.8
PIO_68: JP27.7 U13.21
PIO_69: JP27.4 U13.29
PIO_70: JP26.6 U13.19
PIO_71: JP31.6 U15.28
PIO_72: JP31.5 LED15.A U15.26
PIO_73: JP31.3 U15.14
PIO_74: JP31.2 U15.11
PIO_75: JP31.1 U15.10
PIO_76: JP30.5 LED14.A U15.9
PIO_77: JP30.4 U15.8
PIO_78: JP31.7 U15.21
PIO_79: JP31.4 U15.29
PIO_80: JP30.6 U15.19
RXI: JP1.RXI JP4.RXI R1.2
RXI1: JP5.RXI JP8.RXI R9.2
RXI2: JP9.RXI JP12.RXI R17.2
RXI3: JP13.RXI JP16.RXI R25.2
RXI4: JP17.RXI JP20.RXI R33.2
RXI5: JP21.RXI JP24.RXI R41.2
RXI6: JP25.RXI JP28.RXI R49.2
RXI7: JP29.RXI JP32.RXI R57.2
TXO: JP1.TXO JP4.TXO Q1.3 R3.1
TXO1: JP5.TXO JP8.TXO Q2.3 R10.1
TXO2: JP9.TXO JP12.TXO Q3.3 R18.1
TXO3: JP13.TXO JP16.TXO Q4.3 R26.1
TXO4: JP17.TXO JP20.TXO Q5.3 R34.1
TXO5: JP21.TXO JP24.TXO Q6.3 R42.1
TXO6: JP25.TXO JP28.TXO Q7.3 R50.1
TXO7: JP29.TXO JP32.TXO Q8.3 R58.1
V_UNREG: C3.1 INP.3 U2.1 U2.3
V_UNREG1: C6.1 INP1.3 U4.1 U4.3
V_UNREG2: C9.1 INP2.3 U6.1 U6.3
V_UNREG3: C12.1 INP3.3 U8.1 U8.3
V_UNREG4: C15.1 INP4.3 U10.1 U10.3
V_UNREG5: C18.1 INP5.3 U12.1 U12.3
V_UNREG6: C21.1 INP6.3 U14.1 U14.3
V_UNREG7: C24.1 INP7.3 U16.1 U16.3
VDD: C1.1 INP.1 JP3.8 Q1.1 R4.2 REG.2 U1.17 U1.27
VDD1: C4.1 INP1.1 JP7.8 Q2.1 R11.2 REG1.2 U3.17 U3.27
VDD2: C7.1 INP2.1 JP11.8 Q3.1 R19.2 REG2.2 U5.17 U5.27
VDD3: C10.1 INP3.1 JP15.8 Q4.1 R27.2 REG3.2 U7.17 U7.27
VDD4: C13.1 INP4.1 JP19.8 Q5.1 R35.2 REG4.2 U9.17 U9.27
VDD5: C16.1 INP5.1 JP23.8 Q6.1 R43.2 REG5.2 U11.17 U11.27
VDD6: C19.1 INP6.1 JP27.8 Q7.1 R51.2 REG6.2 U13.17 U13.27
VDD7: C22.1 INP7.1 JP31.8 Q8.1 R59.2 REG7.2 U15.17 U15.27
VIN: INP.2 JP1.VCC JP2.8 JP4.VCC R3.2
VIN1: INP1.2 JP5.VCC JP6.8 JP8.VCC R10.2
VIN2: INP2.2 JP9.VCC JP10.8 JP12.VCC R18.2
VIN3: INP3.2 JP13.VCC JP14.8 JP16.VCC R26.2
VIN4: INP4.2 JP17.VCC JP18.8 JP20.VCC R34.2
VIN5: INP5.2 JP21.VCC JP22.8 JP24.VCC R42.2
VIN6: INP6.2 JP25.VCC JP26.8 JP28.VCC R50.2
VIN7: INP7.2 JP29.VCC JP30.8 JP32.VCC R58.2
WAKE: JP2.7 R2.2 U1.30
WAKE1: JP6.7 R12.2 U3.30
WAKE2: JP10.7 R20.2 U5.30
WAKE3: JP14.7 R28.2 U7.30
WAKE4: JP18.7 R36.2 U9.30
WAKE5: JP22.7 R44.2 U11.30
WAKE6: JP26.7 R52.2 U13.30
WAKE7: JP30.7 R60.2 U15.30